# Altium PCB PART_2.PcbDoc
Units mil, origin at the board's own origin, x right, y up, seen from the top; angles counter-clockwise.
Board outline 1698.82 x 2047.24 mil, 3 copper layers (Top Layer, Mid-Layer 9, Bottom Layer); 68 components, 38 nets, 266 pads, 0 vias.
Unrouted connection lines stored in the file: 1.
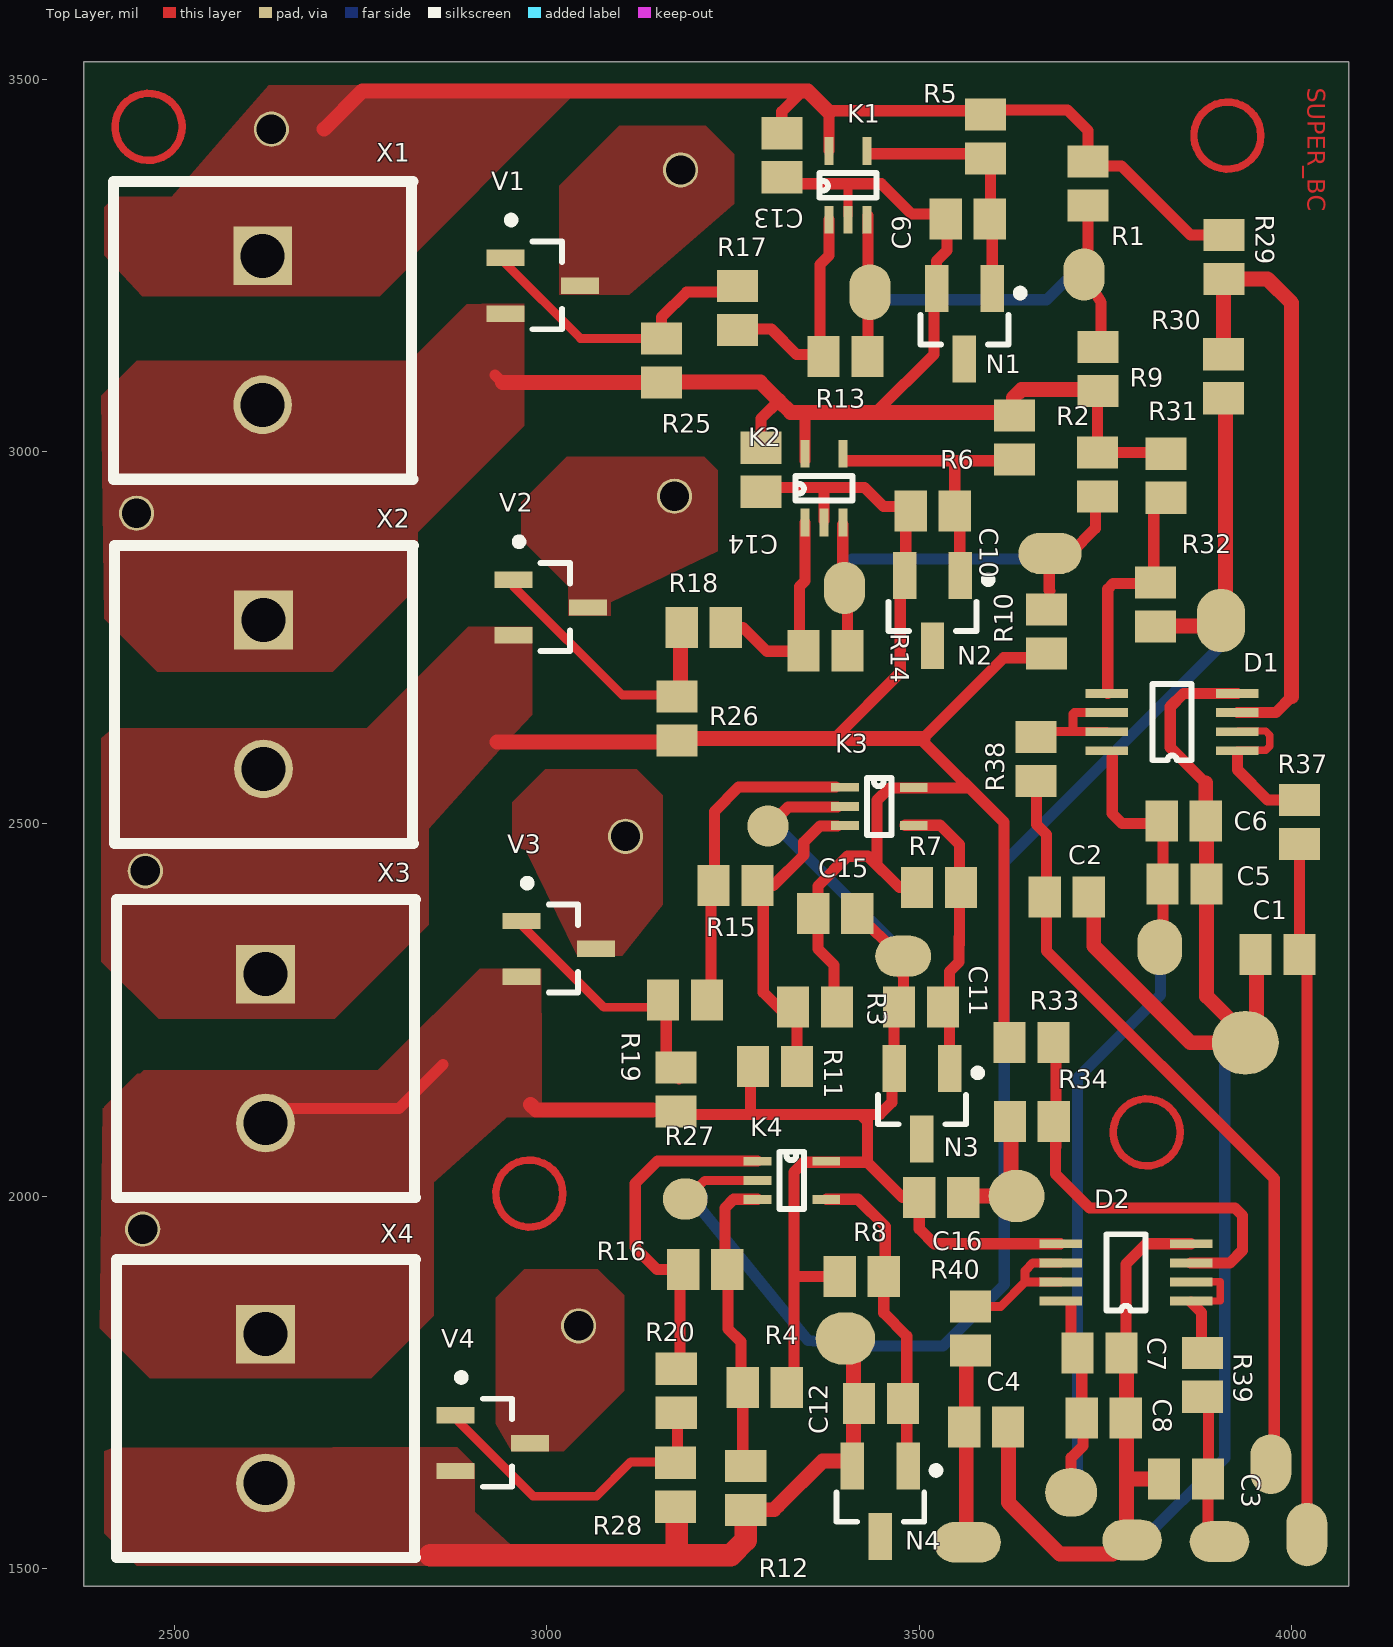
[diagram p0: Top Layer view]
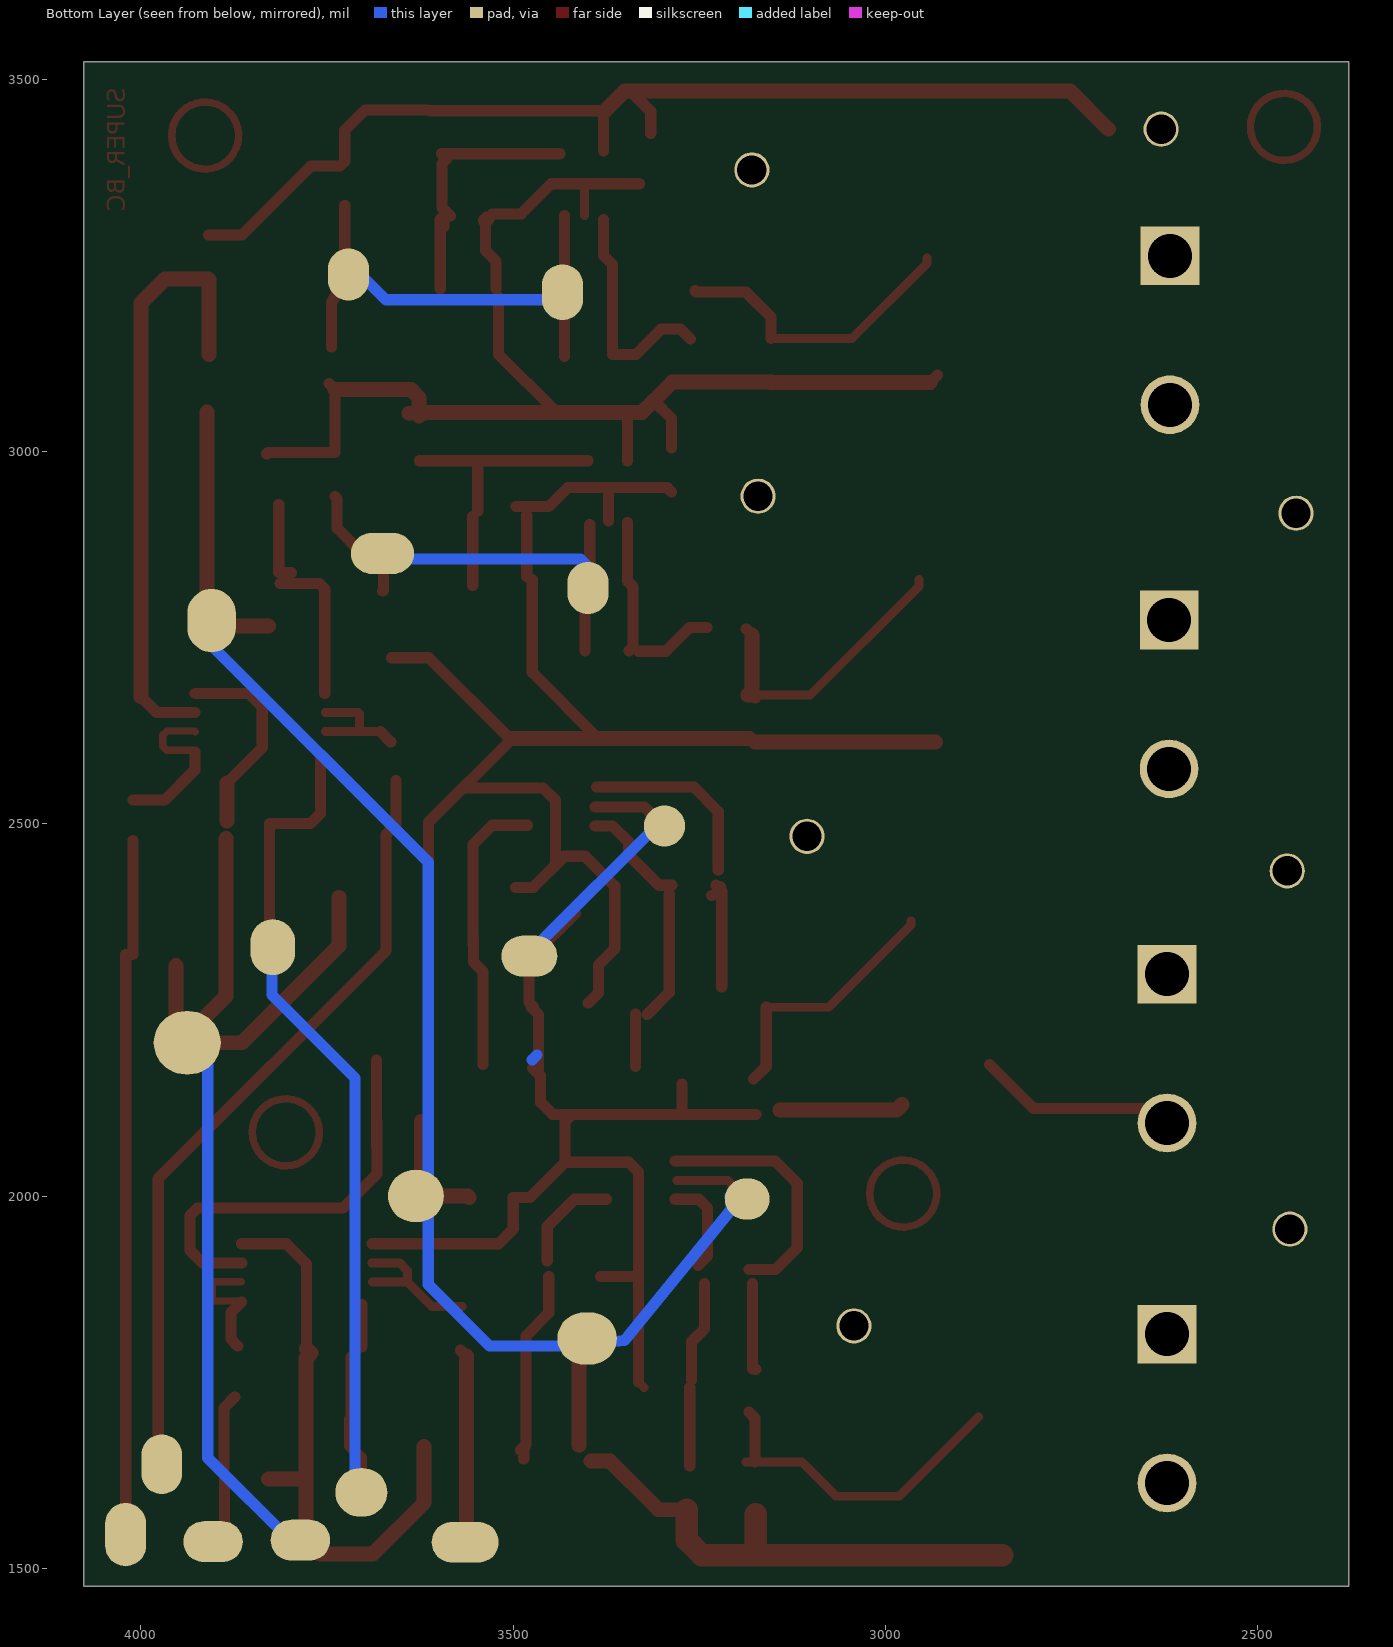
[diagram p1: Bottom Layer view, seen from below]

## Layer stack, top to bottom
Top Solder: solder mask 0.4, Solder Resist, Dk 3.5
Top Layer: signal copper 1.4
Dielectric 1: dielectric 12.6, FR-4, Dk 4.8
Mid-Layer 9: signal copper 1.4
Dielectric2: dielectric 12.6, FR-4, Dk 4.8
Bottom Layer: signal copper 1.4
Bottom Solder: solder mask 0.4, Solder Resist, Dk 3.5

## Board outline
2377.95,1476.38 2377.95,3523.62 4076.77,3523.62 4076.77,1476.38

## Design rules (kind name [scope] priority, off if disabled: settings)
Clearance [All] p1: gap=10 ignorepadtopadclearanceinfootprint=FALSE except(0: Arc-Hole Track-Hole SMDPad-Hole THPad-Hole Via-Hole Fill-Hole Poly-Hole Region-Hole Text-Hole)
MinimumSolderMaskSliver [All] p1: minsoldermaskwidth=2
PolygonConnect PolygonConnect_41 [All vs IsNamedPolygon('NETC10_1_L01_P000')] p1: connectstyle=Direct reliefconductorwidth=10 reliefentries=4 polygonreliefangle="90 Angle" airgapwidth=10
PolygonConnect PolygonConnect_40 [All vs IsNamedPolygon('NETC11_1_L01_P002')] p2: connectstyle=Direct reliefconductorwidth=10 reliefentries=4 polygonreliefangle="90 Angle" airgapwidth=10
PolygonConnect PolygonConnect_39 [All vs IsNamedPolygon('NETC11_1_L01_P003')] p3: connectstyle=Direct reliefconductorwidth=10 reliefentries=4 polygonreliefangle="90 Angle" airgapwidth=10
PolygonConnect PolygonConnect_38 [All vs IsNamedPolygon('GNDS')] p4: connectstyle=Direct reliefconductorwidth=10 reliefentries=4 polygonreliefangle="90 Angle" airgapwidth=10
PolygonConnect PolygonConnect_37 [All vs IsNamedPolygon('GNDS_L01_P006')] p5: connectstyle=Direct reliefconductorwidth=10 reliefentries=4 polygonreliefangle="90 Angle" airgapwidth=10
PolygonConnect PolygonConnect_36 [All vs IsNamedPolygon('GNDS_L01_P006')] p6: connectstyle=Direct reliefconductorwidth=10 reliefentries=4 polygonreliefangle="90 Angle" airgapwidth=10
PolygonConnect PolygonConnect_35 [All vs IsNamedPolygon('GNDS_L01_P080')] p7: connectstyle=Direct reliefconductorwidth=10 reliefentries=4 polygonreliefangle="90 Angle" airgapwidth=10
PolygonConnect PolygonConnect_34 [All vs IsNamedPolygon('GNDS_L01_P080')] p8: connectstyle=Direct reliefconductorwidth=10 reliefentries=4 polygonreliefangle="90 Angle" airgapwidth=10
PolygonConnect PolygonConnect_33 [All vs IsNamedPolygon('GNDS_L01_P080')] p9: connectstyle=Direct reliefconductorwidth=10 reliefentries=4 polygonreliefangle="90 Angle" airgapwidth=10
PolygonConnect PolygonConnect_32 [All vs IsNamedPolygon('GNDS_L01_P080')] p10: connectstyle=Direct reliefconductorwidth=10 reliefentries=4 polygonreliefangle="90 Angle" airgapwidth=10
PolygonConnect PolygonConnect_31 [All vs IsNamedPolygon('GNDS_L01_P001')] p11: connectstyle=Direct reliefconductorwidth=10 reliefentries=4 polygonreliefangle="90 Angle" airgapwidth=10
PolygonConnect PolygonConnect_30 [All vs IsNamedPolygon('GNDS_L01_P001')] p12: connectstyle=Direct reliefconductorwidth=10 reliefentries=4 polygonreliefangle="90 Angle" airgapwidth=10
PolygonConnect PolygonConnect_29 [All vs IsNamedPolygon('NetR23_1')] p13: connectstyle=Direct reliefconductorwidth=10 reliefentries=4 polygonreliefangle="90 Angle" airgapwidth=10
PolygonConnect PolygonConnect_28 [All vs IsNamedPolygon('NetK2_3')] p14: connectstyle=Direct reliefconductorwidth=10 reliefentries=4 polygonreliefangle="90 Angle" airgapwidth=10
PolygonConnect PolygonConnect_27 [All vs IsNamedPolygon('NetK2_3')] p15: connectstyle=Direct reliefconductorwidth=10 reliefentries=4 polygonreliefangle="90 Angle" airgapwidth=10
PolygonConnect PolygonConnect_26 [All vs IsNamedPolygon('NetD2_5')] p16: connectstyle=Direct reliefconductorwidth=10 reliefentries=4 polygonreliefangle="90 Angle" airgapwidth=10
PolygonConnect PolygonConnect_25 [All vs IsNamedPolygon('NetR24_1')] p17: connectstyle=Direct reliefconductorwidth=10 reliefentries=4 polygonreliefangle="90 Angle" airgapwidth=10
PolygonConnect PolygonConnect_24 [All vs IsNamedPolygon('NetR23_1')] p18: connectstyle=Direct reliefconductorwidth=10 reliefentries=4 polygonreliefangle="90 Angle" airgapwidth=10
PolygonConnect PolygonConnect_23 [All vs IsNamedPolygon('NetR21_1')] p19: connectstyle=Direct reliefconductorwidth=10 reliefentries=4 polygonreliefangle="90 Angle" airgapwidth=10
PolygonConnect PolygonConnect_22 [All vs IsNamedPolygon('NetK1_12')] p20: connectstyle=Direct reliefconductorwidth=10 reliefentries=4 polygonreliefangle="90 Angle" airgapwidth=10
PolygonConnect PolygonConnect_21 [All vs IsNamedPolygon('NETR21_1_L01_P032')] p21: connectstyle=Direct reliefconductorwidth=10 reliefentries=4 polygonreliefangle="90 Angle" airgapwidth=10
PolygonConnect PolygonConnect_20 [All vs IsNamedPolygon('NETR21_1_L01_P032')] p22: connectstyle=Direct reliefconductorwidth=10 reliefentries=4 polygonreliefangle="90 Angle" airgapwidth=10
PolygonConnect PolygonConnect_19 [All vs IsNamedPolygon('Net24_1')] p23: connectstyle=Direct reliefconductorwidth=10 reliefentries=4 polygonreliefangle="90 Angle" airgapwidth=10
PolygonConnect PolygonConnect_18 [All vs IsNamedPolygon('Net23_1')] p24: connectstyle=Direct reliefconductorwidth=10 reliefentries=4 polygonreliefangle="90 Angle" airgapwidth=10
PolygonConnect PolygonConnect_17 [All vs IsNamedPolygon('NetR22_1')] p25: connectstyle=Direct reliefconductorwidth=10 reliefentries=4 polygonreliefangle="90 Angle" airgapwidth=10
PolygonConnect PolygonConnect_16 [All vs IsNamedPolygon('NetK1_12')] p26: connectstyle=Direct reliefconductorwidth=10 reliefentries=4 polygonreliefangle="90 Angle" airgapwidth=10
PolygonConnect PolygonConnect_15 [All vs IsNamedPolygon('NetK1_12')] p27: connectstyle=Direct reliefconductorwidth=10 reliefentries=4 polygonreliefangle="90 Angle" airgapwidth=10
PolygonConnect PolygonConnect_14 [All vs IsNamedPolygon('NetR22_1')] p28: thpad.connectstyle=Direct thpad.reliefconductorwidth=10 thpad.reliefentries=4 thpad.polygonreliefangle="90 Angle" thpad.airgapwidth=10 smdpad.connectstyle=Relief smdpad.reliefconductorwidth=10 smdpad.reliefentries=4 smdpad.polygonreliefangle="90 Angle" smdpad.airgapwidth=10 via.connectstyle=Relief via.reliefconductorwidth=10 via.reliefentries=4 via.polygonreliefangle="90 Angle" via.airgapwidth=10
PolygonConnect PolygonConnect_13 [All vs IsNamedPolygon('Net23_1')] p29: connectstyle=Direct reliefconductorwidth=10 reliefentries=4 polygonreliefangle="90 Angle" airgapwidth=10
PolygonConnect PolygonConnect_12 [All vs IsNamedPolygon('Net24_1')] p30: thpad.connectstyle=Direct thpad.reliefconductorwidth=10 thpad.reliefentries=4 thpad.polygonreliefangle="90 Angle" thpad.airgapwidth=10 smdpad.connectstyle=Relief smdpad.reliefconductorwidth=10 smdpad.reliefentries=4 smdpad.polygonreliefangle="90 Angle" smdpad.airgapwidth=10 via.connectstyle=Relief via.reliefconductorwidth=10 via.reliefentries=4 via.polygonreliefangle="90 Angle" via.airgapwidth=10
PolygonConnect PolygonConnect_11 [All vs IsNamedPolygon('NetK1_12')] p31: connectstyle=Direct reliefconductorwidth=10 reliefentries=4 polygonreliefangle="90 Angle" airgapwidth=10
PolygonConnect PolygonConnect_10 [All vs IsNamedPolygon('NetK1_3')] p32: connectstyle=Direct reliefconductorwidth=10 reliefentries=4 polygonreliefangle="90 Angle" airgapwidth=10
PolygonConnect PolygonConnect_9 [All vs IsNamedPolygon('NetK1_3')] p33: connectstyle=Direct reliefconductorwidth=10 reliefentries=4 polygonreliefangle="90 Angle" airgapwidth=10
PolygonConnect PolygonConnect_8 [All vs IsNamedPolygon('NetK2_3')] p34: connectstyle=Direct reliefconductorwidth=10 reliefentries=4 polygonreliefangle="90 Angle" airgapwidth=10
PolygonConnect PolygonConnect_7 [All vs IsNamedPolygon('NETD2_5_L01_P003')] p35: connectstyle=Direct reliefconductorwidth=10 reliefentries=4 polygonreliefangle="90 Angle" airgapwidth=10
PolygonConnect PolygonConnect_6 [All vs IsNamedPolygon('NETD2_5_L01_P002')] p36: connectstyle=Direct reliefconductorwidth=10 reliefentries=4 polygonreliefangle="90 Angle" airgapwidth=10
PolygonConnect PolygonConnect_5 [All vs IsNamedPolygon('NETK2_3_L01_P000')] p37: connectstyle=Direct reliefconductorwidth=10 reliefentries=4 polygonreliefangle="90 Angle" airgapwidth=10
PolygonConnect PolygonConnect_4 [All vs IsNamedPolygon('NETK2_3_L01_P012')] p38: connectstyle=Direct reliefconductorwidth=10 reliefentries=4 polygonreliefangle="90 Angle" airgapwidth=10
PolygonConnect PolygonConnect_3 [All vs IsNamedPolygon('NETD2_5_L01_P010')] p39: connectstyle=Direct reliefconductorwidth=10 reliefentries=4 polygonreliefangle="90 Angle" airgapwidth=10
PolygonConnect PolygonConnect_2 [All vs IsNamedPolygon('NETD2_5_L01_P004')] p40: connectstyle=Direct reliefconductorwidth=10 reliefentries=4 polygonreliefangle="90 Angle" airgapwidth=10
PolygonConnect PolygonConnect_1 [All vs IsNamedPolygon('GNDS_L01_P001')] p41: connectstyle=Direct reliefconductorwidth=10 reliefentries=4 polygonreliefangle="90 Angle" airgapwidth=10
PolygonConnect [All] p42: connectstyle=Relief reliefconductorwidth=10 reliefentries=4 polygonreliefangle="90 Angle" airgapwidth=10
RoutingVias [All] p1: holewidth=28 width=50 viastyle="Through Hole" minholewidth=0 minwidth=0 maxholewidth=78.74 maxwidth=78.74
SilkToSolderMaskClearance [IsPad] p1: minsilkscreentomaskgap=2 clearancetoexposedcopper=TRUE
SolderMaskExpansion [All] p1: expansion=4
Width [All] p1: maxlimit=500 minlimit=10 preferedwidth=10 midlayer9_maxwidth=20 minimp=50.000000 maximp=50.000000 favimp=50.000000
28 further rules are at their usual default settings.

## Components (designator, comment, footprint, x,y, rotation, side; value= is the part's Value field where it differs from the comment)
C1 "Cap" C0805 3981.1,2324.8 r0 top value=1nF
C2 "Cap" C0805 3698.03,2401.97 r180 top value=1nF
C3 "Cap" C0805 3858.27,1620.47 r0 top value=1nF
C4 "Cap" C0805 3589.76,1690.16 r180 top value=1nF
C5 "Cap" C0805 3856.3,2419.68 r180 top value=100nF
C6 "Cap" C0805 3855.12,2503.94 r180 top value=1uF
C7 "Cap" C0805 3742.13,1789.37 r180 top value=100nF
C8 "Cap" C0805 3747.64,1702.36 r180 top value=1uF
C9 "Cap" C0805 3564.96,3312.2 r0 top value=22nF
C10 "Cap" C0805 3518.11,2920.47 r0 top value=22nF
C11 "Cap" C0805 3502.36,2254.33 r0 top value=22nF
C12 "Cap" C0805 3448.43,1722.05 r0 top value=22nF
C13 "Cap" C0805 3315.35,3398.03 r270 top value=100nF
C14 "Cap" C0805 3287.4,2975.59 r270 top value=100nF
C15 "Cap" C0805 3387.01,2379.92 r0 top value=100nF
C16 "Cap" C0805 3529.53,1998.43 r0 top value=100nF
D1 "" "MSOP za op.pojacalo" 3917.32,2598.43 r180 top
D2 "" "MSOP za op.pojacalo" 3855.12,1859.45 r180 top
K1 "TLC3704QJ" TSSOP5-3 3363.94,3317.05 r90 top
K2 "TLC3704QJ" TSSOP5-3 3331.64,2910.35 r90 top
K3 "TLC3704QJ" TSSOP5-3 3405.63,2564.03 r0 top
K4 "TLC3704QJ" TSSOP5-3 3288.19,2061.8 r0 top
N1 "" SOT-23-ref_chip 3485.83,3088.98 r270 top value=1.25V
N2 "LM4040" SOT-23-ref_chip 3442.91,2703.94 r270 top value=1.25V
N3 "LM4040" SOT-23-ref_chip 3428.74,2041.73 r270 top value=1.25V
N4 "LM4040" SOT-23-ref_chip 3372.83,1507.87 r270 top value=1.25V
R1 "47K" C0805 3726.38,3360.24 r90 top
R2 "47K" C0805 3739.37,2969.29 r90 top
R3 "47K" C0805 3359.84,2254.33 r0 top
R4 "47K" C0805 3292.52,1743.31 r0 top
R5 "249K" C0805 3588.98,3423.23 r90 top
R6 "249K" C0805 3627.56,3018.9 r90 top
R7 "249K" C0805 3526.38,2414.57 r180 top
R8 "249K" C0805 3422.83,1892.13 r180 top
R9 "45K3" C0805 3739.76,3111.02 r90 top
R10 "45K3" C0805 3670.87,2758.66 r90 top
R11 "45K3" C0805 3306.3,2174.41 r0 top
R12 "45K3" C0805 3266.93,1608.27 r90 top
R13 "2M" C0805 3400.79,3127.95 r0 top
R14 "2M" C0805 3374.02,2732.68 r0 top
R15 "2M" C0805 3253.15,2417.72 r0 top
R16 "2M" C0805 3212.6,1901.57 r0 top
R17 "200" C0805 3255.91,3192.91 r270 top
R18 "200" C0805 3210.63,2763.78 r0 top
R19 "200" C0805 3185.43,2263.39 r0 top
R20 "200" C0805 3173.62,1738.98 r90 top
R25 "510K" C0805 3153.94,3122.44 r90 top
R26 "510K" C0805 3174.41,2641.73 r90 top
R27 "510K" C0805 3173.23,2143.31 r90 top
R28 "510K" C0805 3172.44,1612.6 r90 top
R29 "" C0805 3909.45,3261.42 r90 top
R30 "" C0805 3908.66,3101.18 r90 top
R31 "" C0805 3831.1,2967.72 r90 top
R32 "" C0805 3817.32,2794.88 r90 top
R33 "" C0805 3650.79,2206.69 r180 top
R34 "" C0805 3651.18,2100.79 r0 top
R37 "" C0805 4010.63,2502.76 r270 top value=800
R38 "" C0805 3656.69,2587.4 r270 top value=800
R39 "" C0805 3880.32,1760.24 r90 top value=800
R40 "" C0805 3568.5,1822.44 r270 top value=800
V1 "NMOS-2" sot23_transistors 2955.39,3259.65 r0 top
V2 "NMOS-2" sot23_transistors 2966.14,2827.56 r0 top
V3 "NMOS-2" sot23_transistors 2977.05,2369.09 r0 top
V4 "NMOS-2" sot23_transistors 2888.46,1705.32 r0 top
X1 "Header 2" "F Header 1x2" 2618.11,3262.99 r0 top
X2 "Header 2" "F Header 1x2" 2619.29,2774.02 r0 top
X3 "Header 2" "F Header 1x2" 2622.05,2298.43 r0 top
X4 "Header 2" "F Header 1x2" 2622.05,1814.96 r0 top

## Footprints (in the part's own frame and the unit in brackets; to place one, negate y for a bottom-side part, rotate by r counter-clockwise, add the part's x,y. Pads: shape width x height; smd on the part's side, far side on the other; paste and mask are expansions set on the pad)
C0805 [mm] "Chip Capacitor, Body 2.0x1.3mm, IPC High Density"
  rect 1.1x1.4 smd: 1(-0.75,0) 2(0.75,0)
  body extent -1.1,-0.72 1.1,0.72, height 1.4
"F Header 1x2" [mm]
  rect 2x2 hole 1.5: 1(0,0)
  round 2 hole 1.5: 2(0,-5.08)
  silkscreen extent -5.08,-7.62 5.12,2.54
"MSOP za op.pojacalo" [mm]
  rect 1.45x0.3 smd mask+0: 1(-0.25,0) 2(-0.25,-0.65) 3(-0.25,-1.3) 4(-0.25,-1.95) 6(4.2,-1.3) 7(4.2,-0.65) 8(4.2,0)
  rect 1.65x0.5 on Top Solder mask+0: 1(-0.25,0) 2(-0.25,-0.65) 3(-0.25,-1.3) 4(-0.25,-1.95) 5(4.2,-1.95) 6(4.2,-1.3) 7(4.2,-0.65) 8(4.2,0)
  rect 1.45x0.3 on Top Paste mask+0: 1(-0.25,0) 2(-0.25,-0.65) 3(-0.25,-1.3) 4(-0.25,-1.95) 6(4.2,-1.3) 7(4.2,-0.65) 8(4.2,0)
  rect 1.45x0.3 smd paste+0 mask+0: 5(4.2,-1.95)
  rect 1.45x0.3 on Top Paste paste+0 mask+0: 5(4.2,-1.95)
  silkscreen extent 1.31,-2.28 2.64,0.33
sot23_transistors [mm]
  rect 1.3x0.559 smd: 1(-0.287,0.015) 2(2.258,-0.935) 3(-0.287,-1.885)
  silkscreen extent -0.22,-2.42 1.64,1.43
SOT-23-ref_chip [mm] "SOT23, 3-Leads, Body 2,92x2,80mm, Pitch 0,95mm, IPC Medium Density"
  rect 1.6x0.8 smd: 1(-3.3,2.85) 2(-3.3,0.95) 3(-0.9,1.9)
  silkscreen extent -3.27,0.4 -1.4,3.93, body extent -2.8,0.38 -1.4,3.42, height 1.45
TSSOP5-3 [mm]
  rect 0.92x0.3 on Top Paste paste-25.44 mask-25.44: 1(-0.15,-0.37) 3(-0.15,-1.03) 6(2.21,-1.67) 12(2.22,-0.38)
  rect 1.15x0.5 on Top Solder paste-25.44 mask-25.44: 1(-0.143,-0.376) 3(-0.143,-1.026) 7(-0.143,-1.67) 12(2.207,-1.676) 12(2.207,-0.376)
  rect 0.95x0.3 smd paste-25.44 mask-25.44: 1(-0.143,-0.375) 3(-0.143,-1.026) 6(2.207,-1.676) 12(2.207,-0.376)
  rect 0.92x0.3 on Top Paste paste-25.4 mask-25.4: 7(-0.15,-1.67)
  rect 0.95x0.3 smd paste-25.4 mask-25.4: 7(-0.143,-1.676)
  silkscreen extent 0.61,-2 1.45,-0.05

## Part data
C1 C2 C3 C4 C5 C6 C7 C8 C9 C10 C11 C12 C13 C14 C15 C16: "Capacitor"
D1 D2: library part Amplifier, cijena (funte)=0.29, dobavljaè=Farnell, kataloški broj=1840875, opis komponente="Operational Amplifier"
K1 K2 K3 K4: library part LP2901D, "Low Power Quad Differential Comparator", cijena (funte)=0.325, dobavljaè=Farnell, kataloški broj=2164804, opis komponente="Analogue Comparator"
N1 N2 N3 N4: library part "referentni chip", cijena (funte)=0.567, dobavljaè=Farnell, kataloški broj=2511278, opis komponente="chip za ref napon"
R1 R2 R3 R4 R5 R6 R7 R8 R9 R10 R11 R12 R13 R14 R15 R16 R17 R18 R19 R20 R25 R26 R27 R28 R29 R30 R31 R32 R33 R34 R37 R38 R39 R40: library part Res2, "Resistor", dobavljaè=Farnell
  R1 R2 R3 R4: cijena (funte)=0.172, kataloški broj=1577628, opis komponente="resistor, 0.1%, 100mW"
  R5 R6 R7 R8: cijena (funte)=0.0452, kataloški broj=2057658, opis komponente="resistor, 1%, 125mW"
  R9 R10 R11 R12: cijena (funte)=0.0173, kataloški broj=2073774, opis komponente="resistor, 125 mW, 1%"
  R13 R14 R15 R16: cijena (funte)=0.0106, kataloški broj=2447628, opis komponente="resistor, 125mW"
  R17 R18 R19 R20: cijena (funte)=0.084, kataloški broj=9334076, opis komponente="resistor, 100mW"
  R25 R26 R27 R28: cijena (funte)=0.0086, kataloški broj=2447678, opis komponente="rsistor, 125mW"
  R29 R30 R31 R32 R33 R34 R37 R38 R39 R40: opis komponente=resistor
V1 V2 V3 V4: "N-Channel Power MOSFET", cijena (funte)=0.388, dobavljaè=Farnell, kataloški broj=2396085, opis komponente=N-MOSFET
X1 X2 X3 X4: "Header, 2-Pin", cijena (funte)=0.239, dobavljaè=Farnell, kataloški broj=2396251, opis komponente="Header, 2-Pin"

## Free pads (board coordinates)
  round 47.24 hole 39.37: 1(2448.82,2917.32) 1(2457.09,1955.91) 1(2460.63,2437.01) 1(2629.92,3433.07) 1(3042.52,1825.98) 1(3105.51,2483.46) 1(3171.26,2940.16) 1(3179.53,3378.35)
  oval 60x55.12 all layers, no hole: 2(3185.83,1996.46)
  round 55.12 all layers, no hole: 2(3296.85,2497.24)
  oval 55.12x70 all layers, no hole: 2(3399.61,2816.93) 2(3721.26,3237.83)
  oval 80x70 all layers, no hole: 2(3400.79,1809.06)
  oval 55.12x75 all layers, no hole: 2(3433.86,3214.17)
  oval 75x55 all layers, no hole: 2(3478.35,2322.44)
  oval 90x55 all layers, no hole: 2(3564.57,1535.43)
  oval 75x70 all layers, no hole: 2(3630.71,2000.39)
  oval 85x55.12 all layers, no hole: 2(3675.59,2863.39)
  oval 70x65 all layers, no hole: 2(3703.94,1602.36)
  oval 80x55.12 all layers, no hole: 2(3785.83,1538.19) 2(3903.15,1536.22)
  oval 60x75 all layers, no hole: 2(3822.83,2334.65)
  oval 65x85 all layers, no hole: 2(3905.12,2773.23)
  oval 90x85 all layers, no hole: 2(3937.8,2206.3)
  oval 55x80 all layers, no hole: 2(3972.05,1640.16)
  oval 55x85 all layers, no hole: 2(4020.47,1545.67)

## Nets (pads, with @x,y where several pads share a name; then routed paths per layer and width w, separated by ;. In a path a pad name is that pad's centre, name@x,y a point inside that pad or via, vN(x,y) a via of type N, cw(c..) or ccw(c..) an arc to the next point about the centre after c; other vN are vias at no path point)
GND: C1.1 C2.1 C3.1 C4.1 C5.1 C6.1 C7.1 C8.1 D1.4@3927.17,2675.2 D2.4@3864.96,1936.22 pad.2@3785.83,1538.19 pad.2@3937.8,2206.3 | length 2544.4
  Top Layer w15: pad.2@3771.65,1531.5 pad.2@3778.35,1531.5 ; C7.1@3777.56,1795.28 3777.56,1909.06 3804.72,1936.22 D2.4@3864.96,1936.22 ; 3884.65,2555.12 3837.01,2602.76 3837.01,2657.48 3854.72,2675.2 D1.4@3927.17,2675.2
  Top Layer w20: C4.1@3619.68,1663.78 3619.68,1588.58 3688.58,1519.68 3759.84,1519.68 pad.2@3771.65,1531.5 ; C2.1@3734.25,2401.57 3734.25,2336.22 3864.17,2206.3 pad.2@3937.8,2206.3 ; C7.1@3777.56,1795.28 C7.1 3778.35,1782.68 3778.35,1620.47 ; pad.2@3778.35,1531.5 3778.35,1620.47 ; C3.1 3778.35,1620.47 ; C6.1 3884.65,2555.12 ; C6.1@3885.83,2480.71 3885.83,2268.5 3942.91,2211.42 3952.76,2221.26 C1.1@3952.76,2309.84
  Bottom Layer w15: pad.2@3771.65,1531.5 3793.31,1531.5 3910.24,1648.43 3910.24,2185.43 pad.2@3933.07,2208.27
GNDS: C12.1 C16.2 K4.3@3282.56,2021.39 N4.2 pad.2@3185.83,1996.46 pad.2@3400.79,1809.06 pad.2@3630.71,2000.39 pad.2@3905.12,2773.23 R12.1 R28.1 R30.1 R32.1 R34.1 V4.3 X4.2 | length 3054.3
  Top Layer w12: pad.2@3186.42,1995.87 3211.93,2021.38 K4.3@3280.21,2021.38
  Top Layer w20: R12.1@3266.93,1579.13 3304.72,1579.13 3310.63,1585.04 3369.98,1644.39 N4.2@3395.57,1644.39 ; N4.2@3411.81,1665.75 pad.2@3411.81,1801.57 ; C16.2 3561.02,2000.39 pad.2@3623.23,2000.39 ; pad.2@3623.23,1984.25 pad.2@3623.23,2000.39 ; R34.1@3623.23,2100.79 pad.2@3623.23,2000.39 ; pad.2@3630.71,2000.39 pad.2@3623.23,2000.39 ; R32.1@3828.74,2765.75 3911.42,2765.75 R30.1@3911.42,3053.15
  Top Layer w30: 2843.31,1518.11 3246.85,1518.11 3266.93,1538.19 R12.1 R12.1@3266.93,1579.13 ; 3174.41,1526.38 R28.1@3174.41,1573.23
  Bottom Layer w15: pad.2@3208.66,2000 3208.07,1994.19 3206.9,1982.78 3350.51,1806.54 pad.2@3395.28,1801.97 ; pad.2@3370.08,1799.21 3531.89,1799.21 3614.17,1881.5 3614.17,2448.82 3905.91,2740.55 3905.91,2749.61 pad.2@3889.76,2765.75
NetC1_2: C1.2 pad.2@4020.47,1545.67 R37.2 | length 941.9
  Top Layer w15: C1.2 R37.2@4010.63,2477.56 ; C1.2@4020.47,2324.8 4020.47,1545.67 pad.2@4027.56,1538.58
NetC2_2: C2.2 pad.2@3972.05,1640.16 R38.2 | length 1071.6
  Top Layer w15: R38.2@3657.48,2558.27 3657.48,2499.21 3670.87,2485.83 3670.87,2329.53 3976.77,2023.62 pad.2@3976.77,1618.9
NetC3_2: C3.2 pad.2@3903.15,1536.22 R39.1 | length 191.5
  Top Layer w15: R39.1@3874.02,1730.32 3888.58,1715.75 C3.2@3888.58,1635.43 ; C3.2 3887.8,1551.57 pad.2@3903.15,1536.22
NetC4_2: C4.2 pad.2@3564.57,1535.43 R40.2 | length 273.7
  Top Layer w15: pad.2@3557.87,1546.01 3564.57,1535.43 3562.99,1564.52 ; R40.2@3562.99,1785.43 R40.2@3570.87,1793.31
  Top Layer w20: 3562.99,1564.52 R40.2@3562.99,1785.43
NetC9_1: C9.1 C13.2 C14.1 K1.3@3404.35,3311.42 K2.12@3346.46,2997.24 N1.2 pad.1@2448.82,2917.32 R2.2 R6.2 R9.1 R25.1 R31.2 V1.3 X1.2 X2.1 | length 1741.3
  Top Layer w12: K1.3@3404.33,3317.32 3404.33,3359.84 3404.33,3361.02
  Top Layer w15: 2930.32,3102.76 2940.16,3092.91 ; C14.1 3287.4,3044.49 3310.63,3067.72 ; C13.2@3330.32,3359.84 3404.33,3359.84 3448.82,3359.84 3489.37,3319.29 C9.1@3527.56,3319.29 ; K2.12@3346.46,2987.4 3346.46,3052.36 ; 3443.5,3054.53 3519.68,3130.71 N1.2@3519.68,3207.87 ; N1.2 3523.23,3255.91 3537.4,3270.08 C9.1@3537.4,3310.24 ; R9.1@3747.64,3091.73 3739.37,3083.46 R2.2 3829.53,2998.82 R31.2
  Top Layer w20: 2940.16,3092.91 R25.1 ; R25.1@3153.94,3093.31 3286.61,3093.31 3311.42,3068.5 3327.17,3052.76 3346.46,3052.76 3443.5,3052.76 3618.9,3052.76 3620.08,3051.57 R6.2@3626.38,3051.57 ; C9.1 C9.1@3537.4,3310.24 ; R6.2@3626.38,3048.03 R6.2@3626.38,3051.57 ; R6.2@3639.76,3051.57 R6.2@3626.38,3051.57 ; R9.1@3739.37,3083.46 3637.4,3083.46 3626.38,3072.44 R6.2@3626.38,3051.57
NetC9_2: C9.2 K1.6@3429.94,3403.94 N1.1 R5.1 | length 358.9
  Top Layer w15: 3437.4,3400 R5.1@3596.46,3400 ; C9.2@3584.25,3316.54 3595.67,3327.95 3595.67,3387.01 R5.1 ; C9.2@3590.55,3322.83 3592.91,3320.47 C9.2@3592.91,3301.97 ; N1.1 C9.2@3598.03,3312.2
NetC10_1: C10.1 C14.2 C15.1 K2.3@3372.05,2904.72 K3.12@3492.52,2549.21 N2.2 pad.1@2460.63,2437.01 R3.2 R7.2 R10.1 R26.1 R33.2 V2.3 X2.2 X3.1 | length 2433.5
  Top Layer w15: R26.1@3175.2,2610.24 3181.1,2616.14 R26.1@3182.68,2614.57 ; C14.2 3293.31,2951.97 3426.38,2951.97 3451.97,2926.38 C10.1@3496.06,2926.38 ; K2.3@3372.05,2906.69 3372.05,2950.39 ; 3386.61,2615.75 3474.41,2703.54 3474.41,2827.95 3481.89,2832.28 C10.1@3481.89,2914.96 ; R3.2@3399.21,2259.45 3385.43,2273.23 3385.43,2310.63 3363.78,2332.28 3363.78,2374.8 3363.78,2416.93 3403.54,2456.69 3431.1,2456.69 3473.23,2414.57 R7.2 ; 3443.31,2446.06 3443.31,2531.89 3459.84,2548.43 ; 3463.39,2612.2 3503.94,2612.2 3613.78,2502.36 R33.2@3613.78,2195.28 ; 3466.54,2548.43 3564.96,2548.43 ; 3504.72,2614.57 3613.39,2723.23 R10.1@3663.39,2723.23
  Top Layer w20: 2933.07,2610.24 R26.1@3175.2,2610.24 ; R26.1@3182.68,2614.57 3504.72,2614.57
NetC10_2: C10.2 K2.6@3397.64,2997.24 N2.1 R6.1 | length 380.7
  Top Layer w15: K2.6@3399.61,2987.8 3547.64,2987.8 R6.1@3625.98,2987.8 ; C10.2 3547.64,2982.28 ; N2.1@3554.33,2820.47 C10.2@3554.33,2912.99
NetC11_1: C11.1 C15.2 C16.1 D2.5@3689.76,1936.22 K3.3@3400,2523.62 K4.12@3375.08,2046.98 N3.2 pad.1@2457.09,1955.91 pad.2@3296.85,2497.24 pad.2@3478.35,2322.44 R4.2 R8.2 R11.1 R27.1 V3.3 X3.2 X4.1 | length 2243.3
  Top Layer w12: R4.2@3324.41,1743.31 R4.2@3331.89,1750.79
  Top Layer w15: X3.2@2618.11,2118.11 2801.18,2118.11 2860.24,2177.17 ; R27.1@3174.02,2109.84 3421.26,2109.84 ; R11.1@3273.23,2150.79 3273.23,2112.6 3275.98,2109.84 ; pad.2@3301.18,2500 3324.02,2522.83 K3.3@3390.16,2522.83 ; R4.2@3331.89,1750.79 3331.89,2032.68 3344.87,2045.65 3430.33,2045.65 ; 3335.83,1892.52 R8.2@3382.68,1892.52 ; C15.2 3474.02,2322.44 pad.2@3478.35,2322.44 ; C15.2@3422.83,2374.8 C15.2@3423.62,2374.02 ; N3.2 3466.14,2244.09 C11.1@3476.38,2254.33 ; pad.2@3466.54,2308.66 3478.74,2296.46 3478.74,2260.24 C11.1 ; N3.2@3474.02,2172.44 3463.39,2161.81 3463.39,2126.38 3446.85,2109.84 3421.26,2109.84 ; D2.5@3689.37,1936.22 3520.08,1936.22 3500,1956.3 C16.1 3477.56,1998.43 3430.33,2045.65 ; 3421.26,2109.84 3430.33,2100.77 3430.33,2045.65
  Top Layer w20: 2977.95,2123.23 2985.43,2115.75 3142.13,2115.75
  Bottom Layer w15: pad.2@3301.18,2503.94 pad.2@3469.29,2335.83 ; 3468.11,2189.76 3474.41,2183.46
NetC11_2: C11.2 K3.6@3492.52,2498.03 N3.1 R7.1 | length 394.9
  Top Layer w15: K3.6@3480.71,2498.41 3527.97,2498.41 3553.94,2472.44 3553.94,2338.19 ; N3.1@3540.55,2177.17 3540.55,2301.97 3553.54,2314.96 3553.54,2348.43
NetC12_2: C12.2 K4.6@3375.08,1995.8 N4.1 R8.1 | length 405.2
  Top Layer w15: K4.6@3375.2,1996.05 3417.73,1996.05 3454.33,1959.45 R8.1@3454.33,1913.39 ; R8.1 3452.36,1843.31 3483.07,1812.6 3483.07,1666.14 N4.1@3490.16,1659.06 ; N4.1@3485.83,1647.24 N4.1@3485.83,1663.39
NetC13_1: C13.1 K1.12@3378.76,3403.94 pad.1@2629.92,3433.07 R1.2 R5.2 R29.2 X1.1 | length 1460.1
  Top Layer w15: C13.1 3315.35,3456.69 3342.91,3484.25 ; 3377.95,3457.87 R5.2@3611.81,3457.87 ; K1.12@3378.76,3403.94 3378.76,3455.89 ; R5.2@3615.75,3459.06 3698.82,3459.06 3726.38,3431.5 R1.2 3732.68,3383.46 3771.65,3383.46 3864.17,3290.94 R29.2
  Top Layer w20: 2700.79,3433.07 2751.97,3484.25 3350.39,3484.25 ; 3342.91,3484.25 3350.39,3484.25 ; 3378.76,3455.89 3350.39,3484.25
NetD1_1: D1.1@3927.17,2598.43 D1.2@3927.17,2624.02 R37.1 | length 231.3
  Top Layer w10: D1.1@3927.17,2598.43 3927.56,2598.82 3965.35,2598.82 3970.87,2604.33 3970.87,2619.06 3965.01,2624.92 3928.07,2624.92 D1.2@3927.17,2624.02
  Top Layer w15: D1.1@3927.17,2596.46 3927.17,2572.83 3967.72,2532.28 R37.1
NetD1_3: D1.3@3927.17,2649.61 R29.1 R30.2 | length 815.8
  Top Layer w15: R29.1@3908.66,3231.1 R29.1 ; D1.3@3927.17,2649.61 3978.74,2649.61 4000,2670.87
  Top Layer w20: R30.2 R29.1@3908.66,3231.1 ; R29.1 3967.72,3231.89 4000,3199.61 4000,2670.87
NetD1_5: D1.5@3751.97,2675.2 R31.1 R32.2 | length 311.4
  Top Layer w15: D1.5@3753.15,2675.2 3753.15,2815.75 3760.24,2822.83 R32.2@3812.99,2822.83 ; R32.2@3797.98,2837.35 3807.44,2837.73 3812.39,2837.93 3814.96,2838.03 R31.1@3814.96,2929.13
NetD1_6: D1.6@3751.97,2649.61 D1.7@3751.97,2624.02 R38.1 | length 163
  Top Layer w12: R38.1@3678.35,2624.02 3706.69,2624.02 ; D1.7@3751.97,2624.02 3706.69,2624.02 ; D1.6@3751.97,2649.61 3751.87,2649.51 3708.29,2649.51 3706.69,2647.91 3706.69,2624.02
  Top Layer w15: R38.1@3664.57,2610.24 R38.1@3678.35,2624.02
NetD2_1: D2.1@3864.96,1859.45 D2.2@3864.96,1885.04 R39.2 | length 172.6
  Top Layer w10: D2.1@3864.96,1859.45 3904.33,1859.45 3904.33,1885.04 D2.2@3864.96,1885.04
  Top Layer w15: D2.1@3864.96,1857.87 3879.13,1843.7 3879.13,1808.27 R39.2@3870.08,1799.21
NetD2_3: D2.3@3864.96,1910.63 R33.1 R34.2 | length 584.5
  Top Layer w15: R34.2@3683.07,2100.79 3683.07,2029.92 3728.74,1984.25 3924.02,1984.25 3934.25,1974.02 3934.25,1927.56 3917.32,1910.63 D2.3@3864.57,1910.63 ; 3683.46,2066.54 R33.1@3683.46,2182.68
NetD2_6: D2.6@3689.76,1910.63 D2.7@3689.76,1885.04 R40.1 | length 201.6
  Top Layer w12: R40.1 3609.05,1851.97 3642.13,1885.04 ; D2.7@3689.37,1885.04 3642.13,1885.04 ; D2.6@3689.76,1910.63 3689.67,1910.54 3652.66,1910.54 3642.13,1900 3642.13,1885.04
NetK1_1: K1.1@3378.7,3311.42 R13.1 R17.2 | length 310
  Top Layer w15: R17.2@3261.81,3151.18 3275.2,3164.57 3301.18,3164.57 3335.04,3130.71 3366.54,3130.71 3366.54,3251.57 3378.7,3263.74 K1.1@3378.7,3311.42
NetK1_7: K1.7@3429.94,3311.42 pad.2@3433.86,3214.17 pad.2@3721.26,3237.83 R1.1 R9.2 R13.2 | length 698.3
  Top Layer w15: R13.2@3431.1,3127.95 K1.7@3431.1,3316.93 ; R1.1 3726.38,3265.35 3721.26,3237.83 3744.09,3200.39 R9.2@3744.09,3140.55
  Bottom Layer w15: pad.2@3429.92,3232.28 3458.27,3203.94 3670.87,3203.94 pad.2@3713.01,3246.08
NetK2_1: K2.1@3346.4,2904.72 R14.1 R18.2 | length 282
  Top Layer w15: R18.2 3263.39,2763.78 3295.28,2731.89 R14.1@3331.5,2731.89 ; R14.1 3338.98,2738.19 3338.98,2818.9 3346.4,2826.32 3346.4,2885.43 K2.1@3346.4,2904.72
NetK2_7: K2.7@3397.64,2904.72 pad.2@3399.61,2816.93 pad.2@3675.59,2863.39 R2.1 R10.2 R14.2 | length 607.8
  Top Layer w15: K2.7@3397.24,2902.36 3397.24,2816.93 3403.54,2810.63 R14.2 ; pad.2@3674.41,2863.39 3674.41,2813.78 3675.2,2812.99 ; pad.2@3675.59,2863.39 3702.76,2863.39 3736.61,2897.24 3736.61,2937.01 R2.1
  Bottom Layer w15: pad.2@3399.61,2845.67 3409.84,2855.91 pad.2@3648.82,2855.91 ; pad.2@3661.81,2856.69 pad.2@3674.41,2856.69
NetK3_1: K3.1@3400,2549.27 R15.1 R19.2 | length 426.3
  Top Layer w15: R19.2@3220.08,2281.1 R15.1@3220.08,2409.84 ; R15.1@3221.65,2411.81 R15.1@3223.62,2413.78 ; R15.1@3221.65,2415.75 R15.1@3223.62,2413.78 ; R15.1@3224.8,2438.19 3224.8,2516.93 3257.48,2549.61 K3.1@3388.19,2549.61 ; R15.1@3233.46,2403.94 R15.1@3220.08,2409.84 ; R15.1@3220.08,2409.84 3227.56,2417.72 R15.1@3223.62,2413.78 ; R15.1@3220.08,2409.84 R15.1@3223.62,2413.78
NetK3_7: K3.7@3400,2498.03 R3.1 R11.2 R15.2 | length 390.8
  Top Layer w15: R15.2@3286.61,2417.72 3304.33,2417.72 3344.88,2458.27 3344.88,2475.59 3366.54,2497.24 K3.7@3390.16,2497.24 ; R15.2@3290.55,2405.91 3290.55,2273.62 R3.1@3320.08,2244.09 ; R11.2 R3.1@3335.83,2244.49
NetK4_1: K4.1@3282.56,2047.03 R16.1 R20.2 | length 458.2
  Top Layer w15: R20.2@3174.41,1767.72 3178.74,1768.5 R16.1@3178.74,1882.68 ; R16.1 3148.03,1901.57 3118.5,1931.1 3118.5,2017.32 3148.46,2047.28 K4.1@3282.68,2047.28
NetK4_7: K4.7@3282.56,1995.8 R4.1 R12.2 R16.2 | length 373.7
  Top Layer w15: R16.2@3243.31,1883.07 3243.31,1822.05 3260.63,1804.72 R4.1@3260.63,1753.15 ; R16.2@3251.97,1907.09 3238.98,1920.08 3238.98,1984.25 3250.77,1996.05 K4.7@3282.68,1996.05 ; R12.2@3262.99,1637.8 R4.1
NetR17_1: R17.1 R25.2 V1.1 | length 404.2
  Top Layer w12: V1.1 2944.09,3253.15 3045.28,3151.97 R25.2
  Top Layer w15: R25.2 3153.94,3180.71 3187.8,3214.57 3254.33,3214.57 R17.1@3255.91,3216.14
NetR18_1: R18.1 R26.2 V2.1 | length 402.4
  Top Layer w12: V2.1 2954.84,2819.57 3101.18,2673.23 R26.2@3179.13,2673.23
  Top Layer w15: R26.2@3174.96,2669.06 3179.13,2673.23 R26.2@3181.1,2675.2 ; R26.2@3179.13,2679.13 R26.2@3185.04,2673.23 ; R18.1@3179.13,2753.94 R18.1@3187.01,2761.81
  Top Layer w20: R26.2@3179.13,2673.23 R26.2@3185.04,2673.23 ; R26.2@3179.13,2679.13 R18.1@3179.13,2753.94
NetR19_1: R19.1 R27.2 V3.1 | length 348.9
  Top Layer w12: V3.1 2965.75,2364.57 3076.38,2253.94 R19.1@3160.24,2253.94
  Top Layer w15: R19.1@3160.24,2253.94 3160.24,2174.41 R27.2@3177.17,2157.48
NetR20_1: R20.1 R28.2 V4.1 | length 445.9
  Top Layer w12: V4.1@2875,1703.74 2981.5,1597.24 3066.54,1597.24 3112.6,1643.31 R28.2@3187.4,1643.31
  Top Layer w15: R28.2@3175.2,1643.31 3175.2,1701.97 R20.1@3183.46,1710.24
NetR21_1: pad.1@3179.53,3378.35 V1.2
NetR22_1: pad.1@3171.26,2940.16 V2.2
NetR23_1: pad.1@3105.51,2483.46 V3.2
NetR24_1: pad.1@3042.52,1825.98 V4.2
VDDA: C5.2 C6.2 C7.2 C8.2 D1.8@3751.97,2598.43 D2.8@3689.76,1859.45 pad.2@3703.94,1602.36 pad.2@3822.83,2334.65 | length 1378.7
  Top Layer w15: C7.2@3703.54,1797.64 D2.8@3703.54,1854.72 ; pad.2@3703.94,1602.36 3703.94,1648.82 3719.68,1664.57 3719.68,1700.79 C8.2 3718.11,1783.86 C7.2 ; 3759.06,2589.65 3759.06,2514.17 3772.44,2500.79 C6.2@3825.59,2500.79 ; pad.2@3811.81,2329.13 3827.17,2344.49 C6.2@3827.17,2500.79
  Bottom Layer w15: pad.2@3712.6,1596.46 3712.6,2155.51 ; 3712.6,2139.76 3712.6,2159.06 3824.02,2270.47 3824.02,2316.93 pad.2@3811.81,2329.13
pads on no net: D1.1@3927.17,2598.43 D1.2@3927.17,2624.02 D1.3@3927.17,2649.61 D1.4@3927.17,2675.2 D1.5@3751.97,2675.2 D1.6@3751.97,2649.61 D1.7@3751.97,2624.02 D1.8@3751.97,2598.43 D2.1@3864.96,1859.45 D2.2@3864.96,1885.04 D2.3@3864.96,1910.63 D2.4@3864.96,1936.22 D2.5@3689.76,1936.22 D2.6@3689.76,1910.63 D2.7@3689.76,1885.04 D2.8@3689.76,1859.45 K1.1@3378.5,3311.14 K1.1@3378.74,3311.42 K1.3@3404.33,3311.42 K1.3@3404.49,3311.14 K1.6@3429.68,3404.05 K1.7@3429.68,3311.14 K1.7@3429.68,3311.42 K1.12@3378.9,3404.45 K1.12@3378.74,3403.94 K1.12@3429.92,3403.94 K2.1@3346.2,2904.45 K2.1@3346.44,2904.72 K2.3@3372.03,2904.72 K2.3@3372.19,2904.45 K2.6@3397.39,2997.36 K2.7@3397.39,2904.45 K2.7@3397.39,2904.72 K2.12@3346.6,2997.76 K2.12@3346.44,2997.24 K2.12@3397.62,2997.24 K3.1@3399.72,2549.46 K3.1@3400,2549.23 K3.3@3399.72,2523.48 K3.3@3400,2523.64 K3.6@3492.64,2498.28 K3.7@3399.72,2498.28 K3.7@3400,2498.28 K3.12@3492.52,2498.05 K3.12@3492.52,2549.23 K3.12@3493.03,2549.07 K4.1@3282.28,2047.23 K4.1@3282.56,2046.99 K4.3@3282.28,2021.24 K4.3@3282.56,2021.4 K4.6@3375.2,1996.05 K4.7@3282.28,1996.05 K4.7@3282.56,1996.05 K4.12@3375.08,1995.81 K4.12@3375.08,2046.99 K4.12@3375.59,2046.83 N1.3 N2.3 N3.3 N4.3
copper on no net: | length 1129.7
  Top Layer w10: 2509.96,3436.22 cw(c2464.96,3436.22) 2509.96,3436.54 ; 3021.36,2003.63 cw(c2976.36,2003.63) 3021.36,2003.95 ; 3850.5,2085.92 cw(c3805.5,2085.92) 3850.49,2086.24 ; 3958.78,3424.41 cw(c3913.78,3424.41) 3958.78,3424.73

## Polygon pours and split planes (outlines as drawn)
NetR24_1 on Top Layer "NetR24_1" (solid, pour order 70): 3022.44,1657.48 3103.94,1738.98 3103.94,1866.93 3068.5,1902.36 2969.68,1902.36 2931.1,1863.78 2931.1,1694.88 2952.76,1657.48
NetR23_1 on Top Layer "NetR23_1" (solid, pour order 62): 3040.55,2323.23 3101.24,2323.23 3155.77,2391.34 3155.77,2538.33 3120.33,2573.76 2997.89,2573.76 2953.6,2529.47 2953.6,2495.34 2953.6,2470.87 2971.26,2464.57
NetC11_1 on Top Layer "NetD2_5" (solid, pour order 60): 2992.91,2186.61 2992.52,2305.91 2936.22,2305.91 2909.45,2305.91 2784.65,2181.1 2784.65,2103.94
NetR22_1 on Top Layer "NetR22_1" (solid, pour order 58): 3050.07,2797.9 2965.35,2882.61 2965.35,2931.89 3026.38,2992.91 3211.42,2992.91 3229.13,2975.2 3229.13,2897.02
NetC9_1 on Top Layer "NetK1_3" (solid, pour order 56): 2695.93,2761.28 2969.68,3035.04 2969.68,3198.43 2912.22,3198.43
NetR21_1 on Top Layer "NetK1_12" (solid, pour order 22): 3027.17,3210.63 3110.38,3210.63 3251.18,3332.71 3251.18,3399.61 3212.99,3437.8 3096.91,3437.8 3016.2,3357.09 3016.2,3210.63 3039.79,3210.63 3046.85,3210.63
NetC11_1 on Top Layer "NETC11_1_L01_P002" (solid, pour order 2): 2399.61,1822.83 2466.53,1755.91 2763.78,1755.91 2847.64,1839.76 2847.64,1892.91 2847.64,2103.15 2781.5,2169.29 2458.66,2169.29 2407.48,2118.11 2403.54,2118.11
NetC10_1 on Top Layer "NETC10_1_L01_P000" (solid, pour order 0): 2417.16,2628.81 2401.57,2615.45 2401.57,2314.96 2478.35,2238.19 2714.96,2238.19 2841.34,2364.57 2841.34,2493.76 2962.66,2628.81
NetC11_1 on Top Layer "NETC11_1_L01_P004" (solid, pour order 4): 2992.91,2186.61 2791.34,2186.61 2871.65,2106.3 2992.91,2106.3
NetC11_1 on Top Layer "NETC11_1_L01_P003" (solid, pour order 3): 2979.92,2187.34 2979.92,2136.61 2761.28,1941.47 2728.35,1974.41 2793.31,2132.68 2822.44,2198.82 3025.59,2196.85 3023.62,2198.82 2802.36,2198.82 2768.11,2164.57 2450,2164.57 2405.51,2120.08 2405.51,2092.52
NetC10_1 on Top Layer "NetK2_3" (solid, pour order 10): 2755.51,2625.59 2894.49,2764.57 2980.32,2764.57 2980.31,2646.79 2926.73,2589.76 2755.51,2589.76
NetC9_1 on Top Layer "NetK1_3" (solid, pour order 12): 2405.51,2775.59 2476.38,2704.72 2712.6,2704.72 2814.96,2807.09 2814.96,2866.14 2826.77,2877.95 2826.77,3015.75 2966.01,3198.03 2892.13,3198.03 2816.14,3122.05 2448.82,3122.05 2401.57,3074.8
NetC13_1 on Top Layer "NetK1_12" (solid, pour order 20): 2472.44,3208.66 2665.35,3208.66 2456.69,3208.66 2405.51,3263.78 2405.51,3327.95 2420.08,3342.52 2496.06,3342.52 2574.8,3433.07 2626.16,3492.13 2763.78,3492.13 2824.02,3492.13 2824.02,3257.09 2775.59,3208.66
NetR22_1 on Top Layer "NetR22_1" (solid, pour order 24): 3151.57,2951.97 3229.13,2951.97 3229.13,2866.58 3085.83,2797.94 3085.83,2779.53 3031.5,2779.53 3028.74,2779.53 3028.74,2951.97
NetC13_1 on Top Layer "NetK1_12" (solid, pour order 40): 3035.04,3477.95 2872.44,3487.01 2781.5,3487.01 2781.89,3486.61 2781.89,3436.22 2805.91,3436.22 2816.14,3425.98 2781.5,3224.41
GNDS on Top Layer "GNDS_L01_P006" (solid, pour order 6): 2405.51,1657.48 2405.51,1547.24 2448.82,1503.94 2643.01,1503.94 2743.63,1662.6 2416.79,1662.6
GNDS on Top Layer "GNDS" (solid, pour order 68): 2712.65,1662.99 2879.53,1662.99 2902.76,1639.76 2902.76,1576.25 2982.2,1503.94 2633.07,1503.94 2631.1,1505.91

## Other copper
Top Layer:
  text "SUPER_BC" at 4013.39,3488.98 h40 r270

## Silkscreen, mask and mechanical layers (free items; w line width, h text height)
Mechanical 1:
  lines w12: 2531.5,3429.13 cw(c2464.98,3436.52) 2531.91,3436.52 ; 3042.9,1996.55 cw(c2976.38,2003.94) 3043.31,2003.94 ; 3871.07,2078.05 cw(c3804.55,2085.44) 3871.36,2081.39 ; 3980.31,3417.32 cw(c3913.8,3424.71) 3980.72,3424.71
  lines w15: 4005.91,3503.94 4043.94,3503.94 ; 4011.81,1496.06 4011.81,1496.06 ; 4011.81,1496.06 4055.12,1496.06 4055.12,1515.12 4055.12,3503.94 4035.43,3503.94 2435.04,3503.94 2397.64,3466.54 2397.64,1529.53 2397.64,1500 2401.57,1496.06 2431.1,1496.06 4011.81,1496.06 ; 2377.95,1476.38 4076.77,1476.38 4076.77,3523.62 2377.95,3523.62 2377.95,1476.38